# Altium PCB PCB1.PcbDoc (part 3 of 3)
Units mil, origin at the board's own origin, x right, y up, seen from the top; angles counter-clockwise.
Board outline 2700 x 1000 mil, 4 copper layers (L1, L2, L3, L4), stack 61.581 mil thick; 64 components, 73 nets, 299 pads, 162 vias.
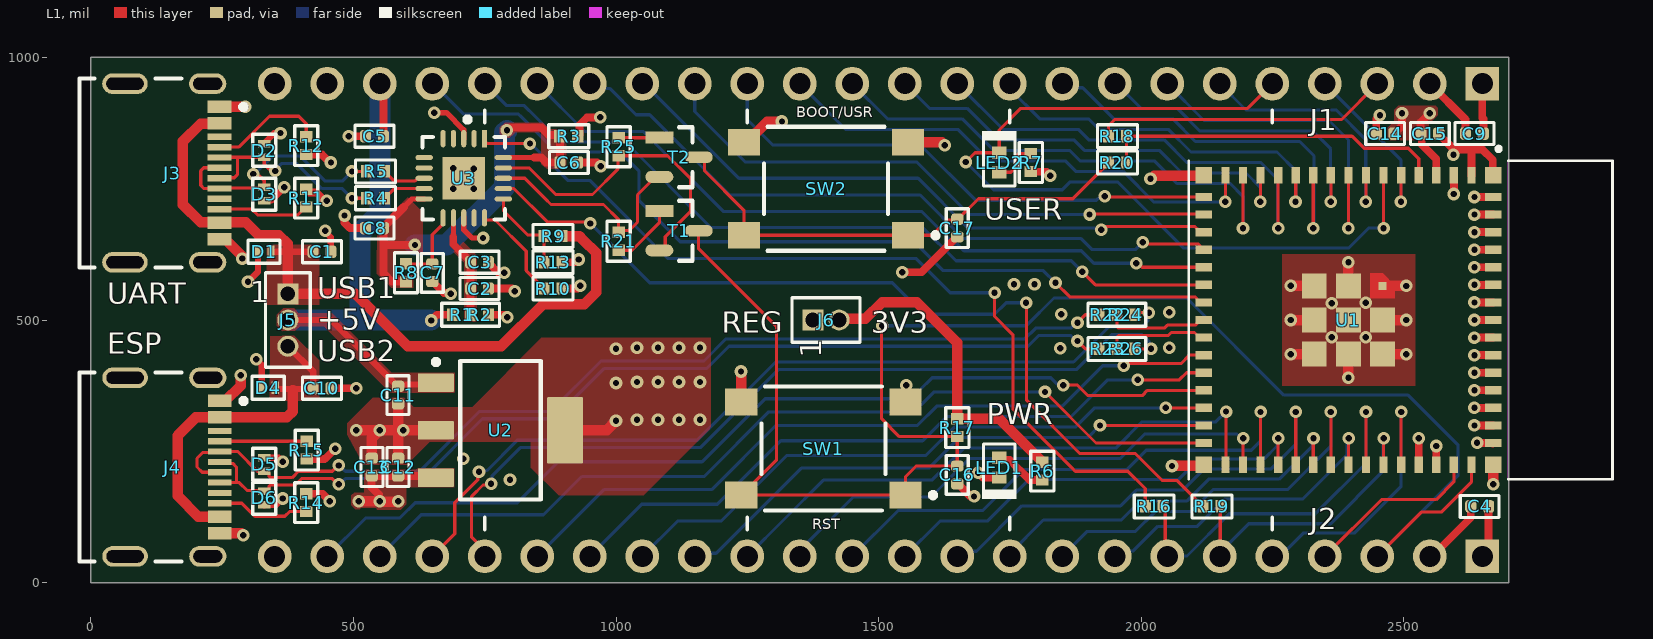
[diagram p0: L1 view]

## Via types
v1: diameter 24, hole 12, L1 to L4, tented both sides, 162 vias

## Nets (pads, with @x,y where several pads share a name; then routed paths per layer and width w, separated by ;. In a path a pad name is that pad's centre, name@x,y a point inside that pad or via, vN(x,y) a via of type N, cw(c..) or ccw(c..) an arc to the next point about the centre after c; other vN are vias at no path point) (continued)
GND: C1.1 C2.1 C3.1 C4.1 C5.1 C6.1 C7.1 C8.1 C9.1 C10.1 C11.1 C12.2 C13.2 C14.1 C15.1 C16.1 C17.1 D1.1 D2.1 D3.1 D4.1 D5.1 D6.1 J1.1 J1.23 J2.2 J2.24 J3.A1B12 J3.B1A12 J3.S1 J3.S2 J3.S3 J3.S4 J4.A1B12 J4.B1A12 J4.S1 J4.S2 J4.S3 J4.S4 LED1.1 R10.2 R11.2 R12.2 R13.1 R14.2 R15.2 SW1.3 SW1.4 SW2.3 SW2.4 U1.1 U1.2 U1.42 U1.43 U1.46 U1.47 U1.48 U1.49 U1.50 U1.51 U1.52 U1.53 U1.54 U1.55 U1.56 U1.57 U1.58 U1.59 U1.60 U1.61 U1.62 U1.63 U1.64 U1.65 U1.66 U1.67 U1.68 U1.69 U1.70 U1.71 U1.72 U1.73 U2.2 U2.4 U3.3 U3.13 U3.21 | length 3888.4
  L1 w10.01: v1(654,895) 677,895 709.77,862.23 709.77,845.65 U3.3 ; U3.13 710.23,694.35 710.23,671.77 725.77,656.23 v1(746.77,656.23)
  L1 w12: v1(299,573) 318.09,592.09 318.09,629.11 D1.1 ; v1(315,425) 325.2,414.8 D4.1 ; D6.1@330,147.2 330.89,148.09 353.09,148.09 v1(365,160) ; D5.1 357.41,237.59 v1(365,230) ; D3.1 330.89,728.09 343.8,728.09 368,752.3 v1(368,753) ; D2.1 330,836.89 349.11,856 v1(361,856) ; v1(446,670) 446,668.36 456.93,657.43 C1.1
  L1 w15: R14.2 440.99,169.01 v1(455,155) ; R11.2 415.89,743.12 429.06,743.12 445.18,727 v1(449,727) ; R12.2 439.81,815 454.81,800 v1(457,800) ; R15.2 444.99,234.99 v1(465,255) ; C10.1 v1(505,370) ; v1(483,699) 483,685.32 493.32,675 C8.1 ; v1(491,850) C5.1 ; C7.1 651.18,573.07 672.53,551.72 683.28,551.72 v1(685,550) ; C2.1 802,560 v1(807,555) ; C3.1 756.93,608.82 775.75,590 v1(787,590) ; R10.2 927,560 v1(932,565) ; R13.1 924,610 v1(929.25,615.25) ; C6.1 964,800 v1(971,793) ; v1(1545,591) 1581.75,591 1648.82,658.07 C17.1 ; C16.1@1648.82,188.07 C16.1 1651.18,188.07 1675.25,164 v1(1682,164) ; v1(1690,209) 1699,200 LED1.1 ; C14.1 2448.07,883.07 v1(2455,890) ; U1.42 v1(2528.9,274.57) ; J2.2 2554.5,50 2628,123.5 2628,140.69 2628.07,140.76 C4.1 ; U1.43 v1(2562.36,260) ; C15.1@2566.93,853.82 2595,825.75 2595,817.82 v1(2595,815) ; v1(2595.83,740) U1.2 ; v1@2601.41,824.23 2601.63,824.46 2630.55,824.46 ; U1.1 2629.29,823.2 2630.55,824.46 ; v1(2635.04,299.21) U1.47 ; v1(2635.04,332.68) U1.48 ; v1(2635.04,366.14) U1.49 ; v1(2635.04,399.61) U1.50 ; v1(2635.04,433.07) U1.51 ; v1(2635.04,466.54) U1.52 ; v1(2635.04,500) U1.53 ; v1(2635.04,533.46) U1.54 ; v1(2635.04,566.93) U1.55 ; v1(2635.04,600.39) U1.56 ; v1(2635.04,633.86) U1.57 ; v1(2635.04,667.32) U1.58 ; v1(2635.04,700.79) U1.59 ; v1(2635.04,734.25) U1.60 ; v1(2640,266) 2668.88,266 2669.88,265 U1.46 ; J1.1 2650,885 2651.93,883.07 C9.1 ; U1.65 U1.65@2671,224.04 ; U1.62 2669.95,776.27 2669.95,805.05 2650.54,824.46 2630.55,824.46
  L1 w20: J3.B1A12 255.67,654.02 288,621.68 v1(288,617) ; J3.A1B12 v1(294,906) ; J4.B1A12 286.06,93.94 v1(290,90) ; J4.A1B12 255.94,345.91 285,374.96 v1(285,395) ; v1(505,290) v1(550,290) ; C13.2 535,275 v1(550,290) ; C12.2 585,278.92 ; 585,301.08 C11.1 ; U2.2 v1(595,290) v1(550,290) ; U2.4 982,290 v1(1000,308) ; v1(1238,402) 1238.5,401.5 SW1.4 ; SW2.4 1248.43,838.58 1287.84,878 v1(1316,878) ; SW1.3 1554,346.09 1552,348.09 1553,349.09 v1(1553,376) ; SW2.3 1620.42,838.58 v1(1626,833) ; v1(2018,769) 2019.08,769 2025.08,775 2113.7,775 2114.29,775.59 U1.63 ; v1(2059,222) 2117.04,222 U1.64 ; v1(2285,565) 2330.04,565 U1.71 ; v1(2285.04,435.04) U1.73 ; v1(2285.04,500) U1.72 ; v1(2395.04,390) U1.70 ; U1.69 v1(2395.04,610) ; U1.68 v1(2505.04,435.04) ; U1.67 v1(2505.04,500) ; U1.66 v1(2505.04,564.96) ; C15.1@2566.93,853.82 C15.1 ; v1@2595,817.82 v1@2601.41,824.23 ; v1(2671,187) U1.65@2671,224.04
  other v1: 798,196 709,236 1040,310 1080,310 1120,310 1160,310 1000,380 1040,382 1080,382 1120,382 1160,382 1000,445 1846,446 1040,447 1080,447 1120,447 1160,447 2054,447 2363,467 2428,467 1848,511 2054,515 2363,532 2428,533 1758,568 1797,568 690,750 729,750 729,788 690,789
GPIO0: R18.2 R20.2 U1.4 | length 656.2
  L1 w6: R20.2 R18.2 2402,850 2425,827 2509,827 2528.9,807.1 U1.4
GPIO1: J1.4 U1.5 | length 335.8
  L1 w6: v1(2495,725) 2495.43,725.43 U1.5
  L4 w6: J1.4 2495,805 v1(2495,725)
GPIO2: J1.5 LED2.1 U1.6 | length 1663.7
  L1 w6: v1(1666,801) 1683.7,818.7 LED2.1 1730,862 1771,903 2203,903 J1.5 ; v1(2461.97,675.04) U1.6
  L4 w6: v1(1666,801) 1719,748 1850.01,748 1865.01,763 1955.18,763 2081.18,637 2395.18,637 2433.22,675.04 v1(2461.97,675.04)
GPIO3: J1.6 U1.7 | length 490.9
  L1 w6: v1@2428.5,725.43 U1.7
  L4 w6: J1.6 2200,900 2371.72,900 2428.07,843.65 v1(2428.07,725)
GPIO4: J1.7 U1.8 | length 657.9
  L1 w6: v1(2395.04,675.04) v1(2395.04,675.04) U1.8
  L4 w6: J1.7 2120,880 2358,880 2395.04,842.96 v1(2395.04,675.04)
GPIO5: J1.8 U1.9 | length 613.6
  L1 w6: v1@2361.57,725.43 U1.9
  L4 w6: J1.8 1953,950 2000,903 2068.72,903 2111.72,860 2327,860 2361.14,825.86 v1(2361.14,725)
GPIO6: J1.9 U1.10 | length 775
  L1 w6: v1(2328.11,675.04) U1.10
  L4 w6: J1.9 1857.73,942.27 1888.73,942.27 1948,883 2060.43,883 2103.43,840 2302,840 2329.4,812.6 2329.4,676.33 v1(2328.11,675.04)
GPIO7: J1.10 U1.11 | length 729.1
  L1 w6: v1@2294.65,725.43 U1.11
  L4 w6: J1.10 1750,940 1807,883 1900,883 1920,863 2052.15,863 2095.15,820 2259,820 2295,784 2295,725.79 v1(2294.21,725)
GPIO8: J1.11 U1.12 | length 879.4
  L1 w6: v1(2261.18,675.04) U1.12
  L4 w6: J1.11 1737,863 1880.43,863 1900.43,843 2043.86,843 2086.86,800 2228,800 2260,768 2260,676.22 v1(2261.18,675.04)
GPIO9: J1.12 U1.13 | length 836.9
  L1 w6: v1@2227.72,725.43 U1.13
  L4 w6: J1.12 1597,903 1668.72,903 1728.72,843 1872.15,843 1892.15,823 2035,823 2078,780 2200,780 2227.28,752.72 v1(2227.28,725)
GPIO10: J1.13 U1.14 | length 994.9
  L1 w6: v1(2194.25,675.04) U1.14
  L4 w6: J1.13 1517,883 1659.28,883 1719.28,823 1863.86,823 1883.86,803 2025.18,803 2068.18,760 2170,760 2195,735 2195,675.79 v1(2194.25,675.04)
GPIO11: J1.14 U1.15 | length 953.7
  L1 w6: v1@2160.79,725.43 U1.15
  L4 w6: J1.14 1437,863 1651,863 1711,803 1855.58,803 1875.58,783 1965.82,783 2023.82,725 v1(2160.35,725)
GPIO12: J1.15 U1.16 | length 1005.3
  L1 w6: v1(1930.79,736) 1932.54,734.25 U1.16
  L4 w6: J1.15 1250,882 1299,833 1580,833 1685,728 1914.89,728 1922.89,736 v1(1930.79,736)
GPIO13: J1.16 U1.17 | length 1104.5
  L1 w6: v1(1902,701) 1903,702 2118.24,702 U1.17
  L4 w6: J1.16 1150,897.04 1246.04,801 1572.72,801 1672.72,701 v1(1902,701)
GPIO14: J1.17 U1.18 | length 1192.5
  L1 w6: v1(1924,672) 1929.91,677.91 2102.84,677.91 2108.7,672.06 2108.7,670.2 2111.57,667.32 U1.18
  L4 w6: J1.17 1054,950 1234,770 1575.43,770 1670.43,675 1911.14,675 1911.46,674.68 1921.32,674.68 v1(1924,672)
GPIO15: J1.18 U1.19 | length 1312
  L1 w6: v1(2003,648) 2006.55,644.45 2108.86,644.45 U1.19
  L4 w6: J1.18 958.73,941.27 987.73,941.27 1038,891 1064,891 1217,738 1579.15,738 1662.15,655 1885.81,655 1906.81,634 1989,634 v1(2003,648)
GPIO16: J1.19 U1.20 | length 1414.3
  L1 w6: v1(1991,608) 1994.79,608 2002.39,600.39 U1.20
  L4 w6: J1.19 941,859 1052,859 1204,707 1581.86,707 1643.86,645 1649.52,645 1662.52,632 1886.18,632 1910.18,608 v1(1991,608)
GPIO17: J1.20 U1.21 | length 1528.1
  L1 w6: v1(1888,592) 1913,567 2119.38,567 U1.21
  L4 w6: J1.20 791.75,908.25 825.28,908.25 846.53,887 865,868.53 894.53,839 1018,839 1181,676 1584.58,676 1647.58,613 1867,613 v1(1888,592)
GPIO18: J1.21 U1.22 | length 1675.9
  L1 w6: v1(1837,571) 1863.94,544.06 2102.84,544.06 2108.7,538.2 2108.7,536.34 2111.57,533.46 U1.22
  L4 w6: J1.21 652,950 709.75,892.25 814.28,892.25 819.53,887 865,841.53 886.53,820 1007,820 1044,783 1044,727 1122,649 1568,649 1623,594 1814,594 v1(1837,571)
GPIO21: J2.19 U1.25 | length 1428.1
  L1 w6: v1(1967,413) 1971,417 2076,417 2092.07,433.07 U1.25
  L4 w6: J2.19 977,177 1182,177 1304,299 1574,299 1611,336 1849.78,336 1926.78,413 v1(1967,413)
GPIO26: J2.18 U1.26 | length 1314.3
  L1 w6: v1(1994,386) 2073,386 2086.61,399.61 U1.26
  L4 w6: J2.18 1049,149 1193,149 1314,270 1584,270 1630,316 1866.72,316 1936.72,386 v1(1994,386)
GPIO33: J2.17 U1.28 | length 1186.5
  L1 w6: v1(2047.32,332.68) U1.28
  L4 w6: J2.17 1117,117 1200,117 1325,242 1590,242 1644,296 1875,296 1911.68,332.68 v1(2047.32,332.68)
GPIO34: J2.16 U1.29 | length 1073.8
  L1 w6: v1@1921,300 v1(1921.79,299.21) U1.29
  L4 w6: J2.16 1155.73,55.73 1190.73,55.73 1353,218 1596,218 1654,276 1898.57,276 v1(1921.79,299.21)
GPIO35: J2.15 U1.31 | length 1126.6
  L1 w6: U1.31@2161.93,225 v1(2161.93,325.55)
  L4 w6: J2.15 1321,121 1395,195 1601.63,195 1662.63,256 1951.72,256 2001.72,306 2142.38,306 v1(2161.93,325.55)
GPIO36: J2.14 U1.32 | length 1001.2
  L1 w6: U1.32 v1@2194.25,274.57
  L4 w6: J2.14 1350,61.14 1451.86,163 1600,163 1673,236 1960,236 2007,283 2182.9,283 2190.9,275 v1(2194.69,275)
GPIO37: J2.13 U1.33 | length 1024.4
  L1 w6: U1.33 v1(2227.72,324.96)
  L4 w6: J2.13 1537,137 1698,137 1776,215 1972.72,215 2009.72,252 2209.87,252 2227.72,269.85 v1(2227.72,324.96)
GPIO38: J2.12 U1.34 | length 862.2
  L1 w6: U1.34 v1@2261.18,274.57
  L4 w6: J2.12 1617,117 1707,117 1786,196 2071.18,196 2110.18,235 2234,235 2258.94,259.94 2258.94,272.32 v1(2261.61,275)
GPIO39: J2.11 U1.35 | length 895
  L1 w6: U1.35 v1(2294.65,324.96)
  L4 w6: J2.11 1659.49,59.49 1686.49,59.49 1773,146 1961.15,146 1991.15,176 2079.47,176 2119.47,216 2247,216 2294.65,263.65 v1(2294.65,324.96)
GPIO40: J2.10 U1.36 | length 732.1
  L1 w6: U1.36 v1@2328.11,274.57
  L4 w6: J2.10 1750,55 1814,119 1962.43,119 1998.43,155 2086.75,155 2128.75,197 2263,197 2325.86,259.86 2325.86,272.32 v1(2328.54,275)
GPIO41: J2.9 U1.37 | length 764.3
  L1 w6: U1.37 v1(2361.57,324.96)
  L4 w6: J2.9 1897.38,97.38 1989.38,97.38 2027,135 2095.04,135 2137.04,177 2279,177 2361.57,259.57 v1(2361.57,324.96)
GPIO42: J2.8 U1.38 | length 605.5
  L1 w6: U1.38 v1@2395.04,274.57
  L4 w6: J2.8 1960.33,60.33 1985.33,60.33 2032,107 2107,107 2159,159 2308,159 2392.79,243.79 2392.79,272.32 v1(2395.47,275)
GPIO45: J2.5 U1.41 | length 542.8
  L1 w6: U1.41 v1(2495.43,324.96)
  L4 w6: J2.5 2265,50 2309,94 2406,94 2495.43,183.43 v1(2495.43,324.96)
GPIO46: J2.4 U1.44 | length 337.2
  L1 w6: J2.4 2458,158 2562,158 2595.83,191.83 U1.44
GPIO47: J2.23 U1.27 | length 1828.8
  L1 w6: v1(1851.59,376) 1879,376 1899,356 2002.18,356 2012.18,366 2119.31,366 U1.27
  L4 w6: J2.23 523,123 588.36,123 617.36,152 812,152 890,230 1164,230 1284,350 1562,350 1563,351 1563.36,351 1578,365.64 1578,366 1601.99,389.98 1785.8,389.98 1828.18,390 1839.5,378.68 1848.91,378.68 v1(1851.59,376)
GPIO48: J2.22 U1.30 | length 1739.4
  L1 w6: v1(1817,363) 1914.25,265.75 U1.30
  L4 w6: J2.22 629,129 862,129 935,202 1168,202 1291,325 1568,325 1606,363 v1(1817,363)
NetJ3_A5: J3.A5 R12.1 | length 220.3
  L1 w6: J3.A5 280,829.21 281.21,829.21 340,888 396,888 410,874 R12.1
NetJ3_B5: J3.B5 R11.1 | length 176
  L1 w6: J3.B5 306.19,711.1 317.29,700 393.83,700 408.82,714.99 R11.1
NetJ4_A5: J4.A5 R15.1 | length 165.9
  L1 w6: J4.A5 245.18,269.07 410.94,269.07 R15.1
NetJ4_B5: J4.B5 R14.1 | length 178.8
  L1 w6: J4.B5 287.27,151.02 312.09,126.2 369.39,126.2 378.18,134.99 R14.1
NetLED1_2: LED1.2 R6.1 | length 99.6
  L1 w15: LED1.2 1734.31,233.09 1749.91,233.09 1787.87,195.13 1811.87,195.13 R6.1
NetLED2_2: LED2.2 R7.1 | length 87.1
  L1 w6: LED2.2 1752.14,781.3 1761,790.16 1761,811.15 1766.86,817.01 R7.1
NetR10_1: R10.1 U3.15 | length 194.1
  L1 w6: U3.15 749.37,690.63 749.6,690.4 769.6,690.4 829,631 829,594 856.19,566.81 857.36,566.81 862.99,561.18 R10.1
NetR21_1: R21.1 T1.1 | length 121.4
  L1 w6: R21.1 1030.38,632.99 1082.58,685.19 T1.1
NetR25_1: R25.1 T2.1 | length 77.7
  L1 w6: R25.1 1005.2,847.2 1082.38,847.2 T2.1
RTS_FTDI: R25.2 T1.2 U3.19 | length 604.8
  L1 w6: U3.19 834.32,789.68 865,759 885,739 955.18,739 1003.55,787.36 1003.55,811.54 R25.2 1098.01,812.99 1142,769 1142,707.17 1093.69,658.86 1093.69,638.38 1087.91,632.6 T1.2
RXD_FTDI: R16.2 U3.1 | length 1675.6
  L1 w6: U3.1@749.6,841 754.6,836 v1(836,836) ; v1(1721,552) 1721,507 1756,472 1756,331 1875,212 1975,212 2007.99,179.01 R16.2
  L4 w6: v1(836,836) 838,836 908,766 950,766 1099,617 1571.72,617 1636.72,552 v1(1721,552)
TXD_FTDI: R19.2 U3.17 | length 1710.6
  L1 w6: U3.17 805.68,750.32 869.19,686.81 948.19,686.81 v1(951,684) ; v1(1781,533) 1782,532 1782,347 1883.25,245.75 1989.13,245.75 2040.87,194 2068.99,194 2111.18,151.81 2112.36,151.81 2117.99,146.18 R19.2
  L4 w6: v1(951,684) 1064,571 1526,571 1586,511 1721,511 1743,533 v1(1781,533)
U0RXD: J2.6 R19.1 U1.40 | length 591.8
  L1 w6: J2.6 2151,51 2151,144 R19.1 ; U1.40 v1@2461.97,274.57
  L4 w6: J2.6 2150,57 2205,112 2361,112 2460.72,211.72 2460.72,273.31 v1(2462.4,275)
U0TXD: J2.7 R16.1 U1.39 | length 748.3
  L1 w6: R16.1 2046,141 2046,54 J2.7 ; U1.39 v1(2428.5,324.96)
  L4 w6: J2.7 2050.49,50.49 2087.49,50.49 2168,131 2332,131 2428.5,227.5 v1(2428.5,324.96)
"VBUS SENSE": R9.1 R13.2 U3.16 | length 171.7
  L1 w6: U3.16 785.41,708.59 832,662 860.99,662 R9.1 ; R13.2 R9.1@862.99,662
pads on no net: J1.24 J3.A8 J3.B8 J4.A8 J4.B8 U3.2 U3.4 U3.5 U3.6 U3.7 U3.14

## Polygon pours and split planes (outlines as drawn)
GND on L1 "GND_L01_P011" (solid, pour order 11): 1180,291 1180,466 858,466 726,334 614,334 614,335 597,352 537,352 488,303 488,281 505,250 519,224 601,224 645,268 838,268 838,219 891,166 1053,166 1179,292
GND on L1 "GND_L01_P010" (solid, pour order 10): 2522,625 2522,375 2269,375 2269,625
+VCC_FTDI on L1 "+VCC_FTDI_L01_P009" (solid, pour order 9): 735,497 735,623 709,649 690,630 711,609 711,497
+5V_VBUS2 on L1 "+5V_VBUS2_L01_P008" (solid, pour order 8): 340.46,346.38 341.53,469.5 386.49,470.5 435,423 435,346.38
+5V_VBUS1 on L1 "+5V_VBUS1_L01_P007" (solid, pour order 7): 335,643 435,643 435,529 433,529 334,529 335,530
+5V on L1 "+5V_L01_P006" (solid, pour order 6): 693,400 573,400 460,513 396,513 386,523 367,523 354,510 354,489 363,480 364.54,478.46 388.62,479.5 399,488 443,488 570,361 692,361 693,362
+3V3_REG on L1 "+3V3_REG_L01_P005" (solid, pour order 5): 692,181 692,218 622,218 618.93,214.94 520,214.93 520,171 501,171 496,166 496,147 503,140 512,140 514,142 542,142 545,139 590,139 600,149 600,181
"+3v3 FTDI" on L1 "+3V3_FTDI_L01_P003" (solid, pour order 3): 614.07,561.32 571.95,561.05 544.75,588.25 545.07,678.93 546.97,687.03 558.46,689.25 560.8,691.25 603.5,733.5 613.57,723.43 632.07,704.93 632.07,655.93 632.07,625.93 580.44,625.93 579.07,584.93 589.07,584.93 614.07,584.93
"+3v3 FTDI" on L1 "+3V3_FTDI_L01_P004" (solid, pour order 4): 861,876 874,863 905,863 905,788 868.04,788 858,796.31 858,858 807,858 807,856 798,847 787,847 779,855 779,867 788,876
+3v3 on L1 "+3V3_L01_P000" (solid, pour order 0): 2470,866 2470,842 2542,842 2548,848 2548,873 2565,890 2565,908 2490,908 2482,900 2482,873 2477,873
GND on L2 "GND_L02_P014" (solid, remove dead copper, pour order 14): 2682,18 2682,982 21,982 20,983 20,12
+3v3 on L2 "+3V3_L02_P012" (solid, pour order 12): 2682,982 915,982 915,830 985,830 1205,610 1325,610 1403,532 1403,476 1448,476 1448,618 1525,695 1715,695 1755,735 1860,735 1915,790 2510,790 2535,765 2535,590 2535,550 2535,185 2383.33,185 2310,97 2310,18 2682,18
+3V3_REG on L2 "+3V3_REG_L02_P013" (solid, pour order 13): 496,219 705,219 705,107 496,107
GND on L3 (split plane): 2699.95,0.05 0.05,0.05 0.05,999.95 2699.95,999.95

## Silkscreen, mask and mechanical layers (free items; w line width, h text height)
Top Overlay:
  lines w6: 750,100 750,125 ; 750,875 750,900 ; 1250,100 1250,125 ; 1250,875 1250,900 ; 1750,100 1750,125 ; 1750,875 1750,900 ; 2250,100 2250,125 ; 2250,875 2250,900
  text "BOOT/USR" at 1343.36,886 h20
  text "J1" at 2321,861 h40
  text "USER" at 1701,691 h40
  text "USB1" at 431,541 h40
  text "UART" at 31,531 h40
  text "+5V" at 431,481 h40
  text "REG" at 1201,476 h40
  text "3V3" at 1486,476 h40
  text "ESP" at 31,436 h40
  text "USB2" at 431,421 h40
  text "PWR" at 1706,301 h40
  text "RST" at 1373.34,101 h20
  text "J2" at 2321,101 h40
Bottom Overlay:
  text "NC" at 374,864 h40 r90
  text "GND" at 474,864 h40 r90
  text "+5V" at 574,864 h40 r90
  text "GPIO18" at 674,864 h40 r90
  text "GPIO17" at 774,864 h40 r90
  text "GPIO16" at 874,864 h40 r90
  text "GPIO15" at 974,864 h40 r90
  text "GPIO14" at 1074,864 h40 r90
  text "GPIO13" at 1174,864 h40 r90
  text "GPIO12" at 1274,864 h40 r90
  text "GPIO11" at 1374,864 h40 r90
  text "GPIO10" at 1474,864 h40 r90
  text "GPIO9" at 1574,864 h40 r90
  text "GPIO8" at 1674,864 h40 r90
  text "GPIO7" at 1774,864 h40 r90
  text "GPIO6" at 1874,864 h40 r90
  text "GPIO5" at 1974,864 h40 r90
  text "GPIO4" at 2074,864 h40 r90
  text "GPIO3" at 2174,864 h40 r90
  text "GPIO2" at 2274,864 h40 r90
  text "GPIO1" at 2374,864 h40 r90
  text "GPIO0" at 2474,864 h40 r90
  text "3V3" at 2574,864 h40 r90
  text "GND" at 2674,864 h40 r90
  text "'.Print_Date'  BardiaSign" at 1684,559.33 h40
  text "<--PIN1-->" at 2674,316 h40 r90
  text "GND" at 326,136 h40 r270
  text "GPIO47" at 426,136 h40 r270
  text "GPIO48" at 526,136 h40 r270
  text "USB_N" at 632.66,136 h40 r270
  text "USB_P" at 732.66,136 h40 r270
  text "GPIO21" at 826,136 h40 r270
  text "GPIO26" at 926,136 h40 r270
  text "GPIO33" at 1026,136 h40 r270
  text "GPIO34" at 1126,136 h40 r270
  text "GPIO35" at 1226,136 h40 r270
  text "GPIO36" at 1326,136 h40 r270
  text "GPIO37" at 1426,136 h40 r270
  text "GPIO38" at 1526,136 h40 r270
  text "GPIO39" at 1626,136 h40 r270
  text "GPIO40" at 1726,136 h40 r270
  text "GPIO41" at 1826,136 h40 r270
  text "GPIO42" at 1926,136 h40 r270
  text "U0TXD" at 2026,136 h40 r270
  text "U0RXD" at 2126,136 h40 r270
  text "GPIO45" at 2226,136 h40 r270
  text "GPIO46" at 2326,136 h40 r270
  text "CHIP_PU" at 2432.66,136 h40 r270
  text "GND" at 2526,136 h40 r270
  text "3V3" at 2626,136 h40 r270
Board shape:
  the board outline again, w20

## Text inside footprints (layer, text, board x,y; h text height)
J1: Bottom Overlay "1" at 2636,1016 h40 r270
J2: Bottom Overlay "1" at 2625,-34 h40 r270
J5: Top Overlay "1" at 303,534 h40
J6: Top Overlay "1" at 1391,428 h40 r90